# Altium PCB PCB_DevKit_ESP32.PcbDoc
Units mil, origin at the board's own origin, x right, y up, seen from the top; angles counter-clockwise.
Board outline 2364 x 1248 mil, 2 copper layers (Top Layer, Bottom Layer), stack 43.13 mil thick; 35 components, 50 nets, 194 pads, 59 vias.
Unrouted connection lines stored in the file: 2.
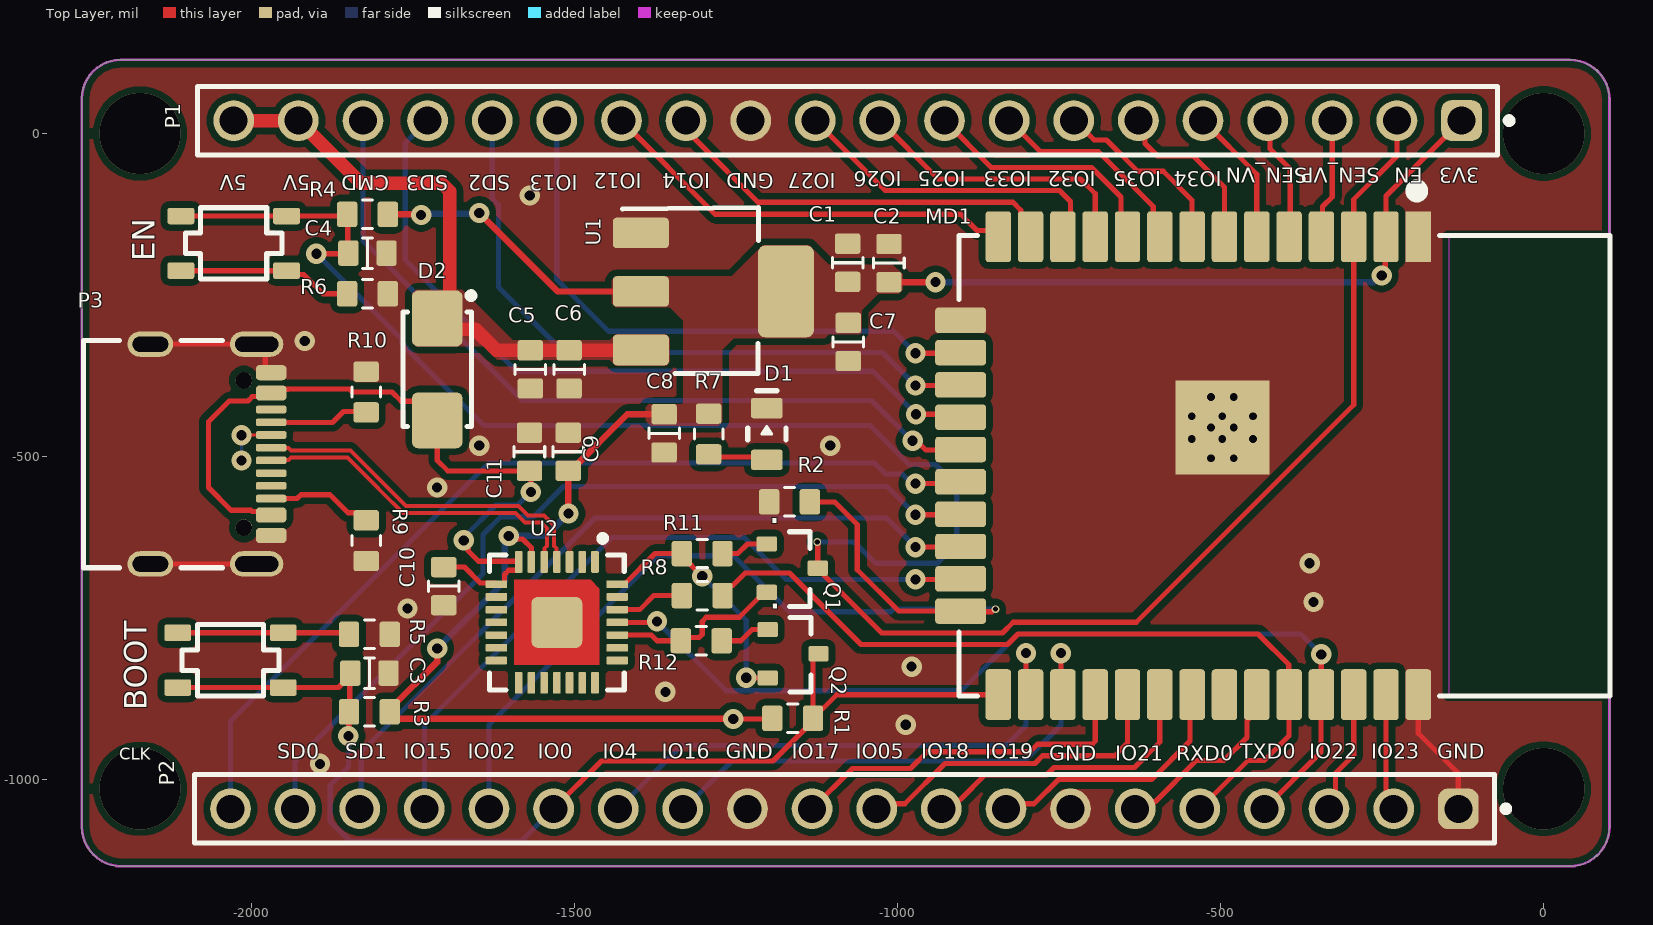
[diagram p0: Top Layer view]
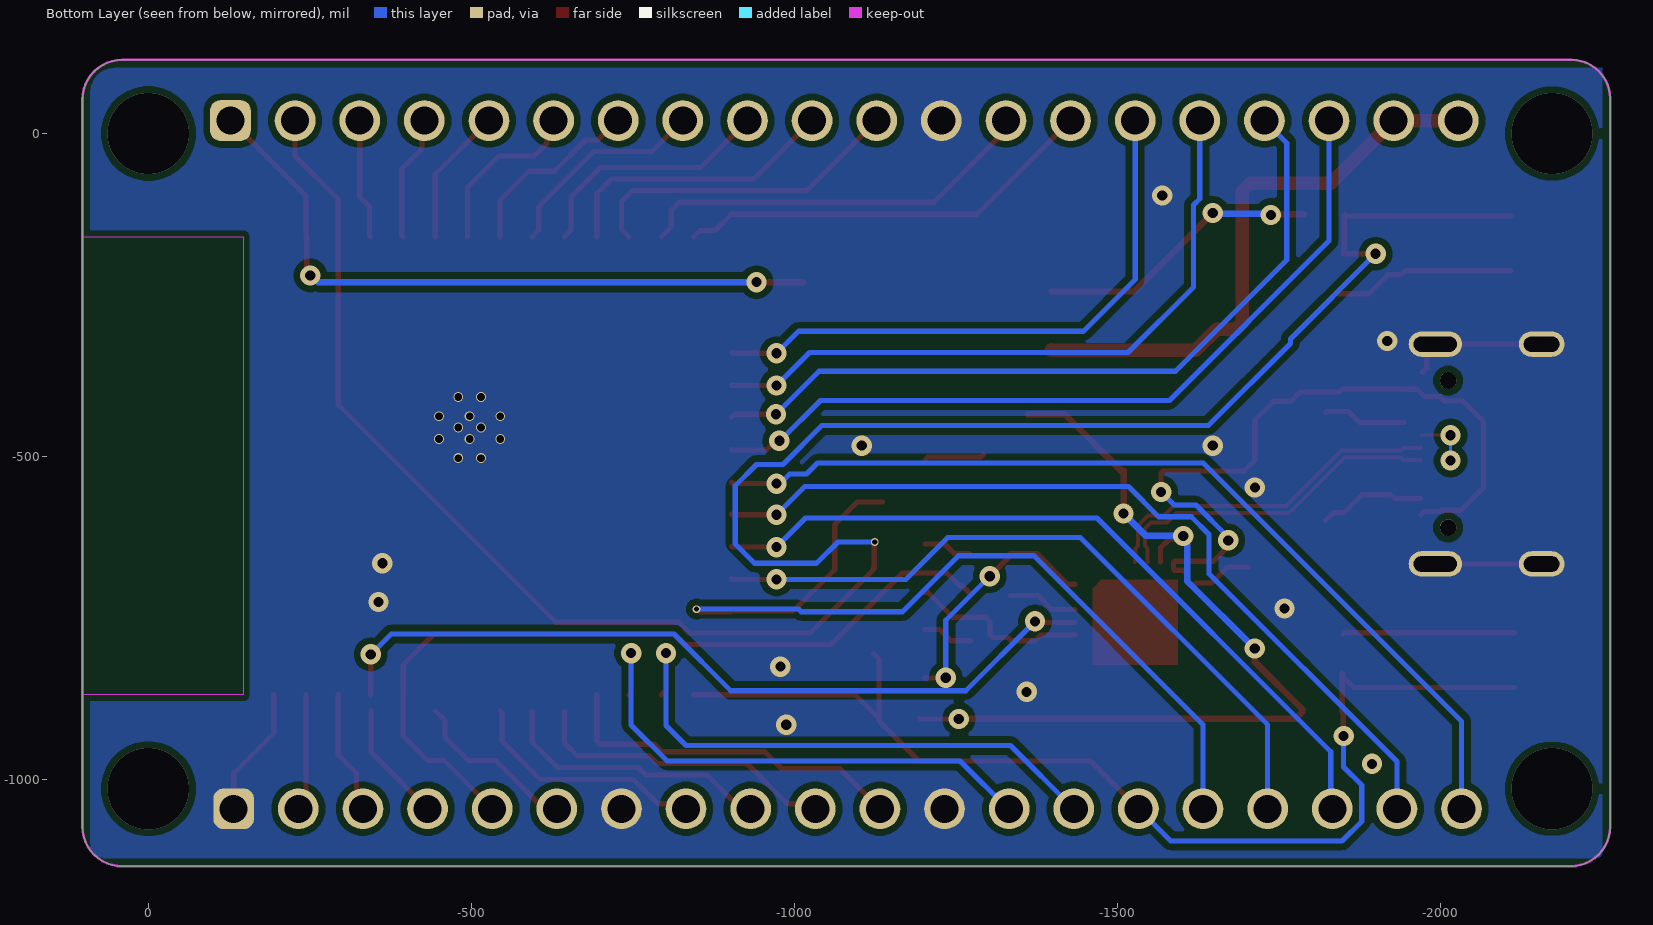
[diagram p1: Bottom Layer view, seen from below]
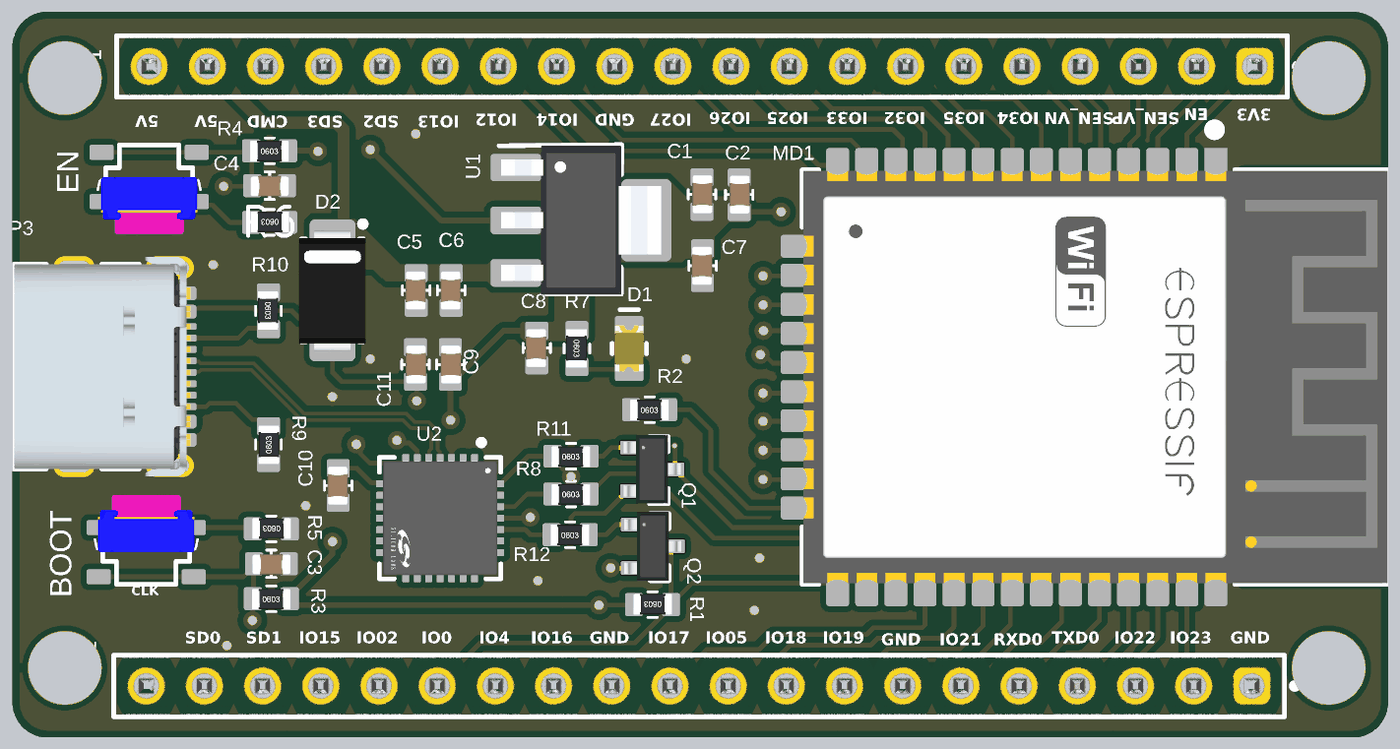
[diagram p2: 3D render of the assembled board from above, using the file's embedded part models]

## Layer stack, top to bottom
Top Solder: solder mask 0.4, Solder Resist, Dk 3.5
Top Layer: signal copper 0.6
Dielectric 1: dielectric 41.93, FR-4, Dk 4.8
Bottom Layer: signal copper 0.6
Bottom Solder: solder mask 0.4, Solder Resist, Dk 3.5

## Board outline
-2262,-1072.54 -2262,54 cw(c-2202,54) -2202,114 40.54,114 cw(c40.54,52.54) 102,52.54 102,-1072.54 cw(c40.54,-1072.54) 40.54,-1134 -2200.54,-1134 cw(c-2200.54,-1072.54)

## Design rules (kind name [scope] priority, off if disabled: settings)
Clearance [All] p1: gap=10 ignorepadtopadclearanceinfootprint=FALSE
DiffPairsRouting [InDifferentialPairClass('All Differential Pairs')] p1: maxlimit=4.99 minlimit=4.99 mostfreqgap=4.99 toplayer_minwidth=6 toplayer_maxwidth=19.13 toplayer_prefwidth=19.13 bottomlayer_minwidth=6 bottomlayer_maxwidth=19.13 bottomlayer_prefwidth=19.13 impedanceprofiledriven=TRUE impedanceprofileid={9CC0AA3F-7C3E-491D-B543-20747BA928EE} impedanceprofilevalue=90.000000 maxuncoupledlength=500
PolygonConnect [All] p1: connectstyle=Direct reliefconductorwidth=10 reliefentries=4 polygonreliefangle="90 Angle" airgapwidth=10
RoutingVias [InNetClass('All Nets')] p1: holewidth=8 width=12 viastyle="Through Hole" minholewidth=8 minwidth=12 maxholewidth=8 maxwidth=12 viatemplateguid#1={E89F5CC9-6383-4E06-893D-726549EC8DC4} viatemplatename#1=v38h30
SolderMaskExpansion [ViaDiameter] p1: expansion=0 istentingtop=TRUE useseparateexpansions=TRUE expansionbottom=0 istentingbottom=TRUE
SupplyNets "Schematic Supply Nets_3" [InNet('EXT_5V')] p1: voltage=0.000
SupplyNets "Schematic Supply Nets_2" [InNet('+3V3')] p2: voltage=0.000
SupplyNets "Schematic Supply Nets_1" [InNet('GND')] p3: voltage=0.000
Width [InNetClass('50ohm')] p1: maxlimit=73.29 minlimit=73.29 preferedwidth=73.29 impedanceprofiledriven=TRUE impedanceprofileid={D5905C2B-C446-428B-AADE-5B11549CC50C} impedanceprofilevalue=50.000000 minimp=50.000000 maximp=50.000000 favimp=50.000000
29 further rules are at their usual default settings.

## Classes and differential pairs
component class Designator: BOOT C1 C2 C3 C4 EN MD1 P2 R1 R2 R3 R4 R5 R6
differential pair D: +D_P -D_N

## Components (designator, comment, footprint, x,y, rotation, side; value= is the part's Value field where it differs from the comment)
BOOT "SKRPABE010" BTN_SKRPABE010 -2032,-815 r0 top (schematic designator BN1)
C1 "22uF" CAP_0603 -1077,-200 r270 top
C2 "0.1uF" CAP_0603 -1013,-200.47 r270 top
C3 "1uF" CAP_0603 -1817,-835 r180 top
C4 "1uF" CAP_0603 -1820,-185 r180 top
C5 "10uF" CAP_0603 -1568,-365 r90 top
C6 "100nF" CAP_0603 -1508,-365 r90 top
C7 "10uF" CAP_0603 -1076,-322.53 r90 top
C8 "100nF" CAP_0603 -1361,-464 r90 top
C9 "1uF" CAP_0603 -1509.31,-492.47 r270 top
C10 "10nF" CAP_0603 -1702,-700.47 r90 top
C11 "100nF" CAP_0603 -1569.31,-492.47 r270 top
D1 "LED RED" LED_RED_V0805 -1202,-465 r90 top
D2 "SS34" DIO_SMA -1712,-365 r270 top
EN "SKRPABE010" BTN_SKRPABE010 -2027,-170 r180 top (schematic designator BN2)
MD1 "ESP32-WROOM-32D" MD_ESP32_WROOM_D -497,-455 r270 top
P1 "61302011121" 61302011121 -1077,20 r180 top
P2 "61302011121" 61302011121 -1082,-1045 r180 top
P3 "USB_2.0_TYPE-C" CON_USB_2.0_TYPE-C -2111,-496 r270 top
Q1 "BC846x" "BJT_ BC846x" -1162.63,-672.6 r0 top
Q2 "BC846x" "BJT_ BC846x" -1161.37,-805 r0 top
R1 "5K" RES_0603 -1162,-905 r180 top
R2 "5K" RES_0603 -1167,-570 r0 top
R3 "10k" RES_0603 -1817,-895 r0 top
R4 "10k" RES_0603 -1820,-125 r0 top
R5 "330" RES_0603 -1817,-775 r180 top
R6 "330" RES_0603 -1820,-248 r180 top
R7 "220" RES_0603 -1292,-465 r270 top
R8 "470" RES_0603 -1302,-715 r0 top
R9 "5.1K" RES_0603 -1822,-630 r90 top
R10 "5.1K" RES_0603 -1822,-400 r270 top
R11 "12K" RES_0603 -1302,-650 r0 top
R12 "12K" RES_0603 -1303.5,-785 r0 top
U1 "+3V3" PWR_LD1117_SOT223 -1284.79,-244.45 r0 top
U2 "CP2102" INF_CP2102 -1527,-756.5 r270 top

## Footprints (in the part's own frame and the unit in brackets; to place one, negate y for a bottom-side part, rotate by r counter-clockwise, add the part's x,y. Pads: shape width x height; smd on the part's side, far side on the other; paste and mask are expansions set on the pad)
61302011121 [mm] "Pin Header, pitch 2.54 mm, THT, Vertical, single row, 20p"
  rrect50% 1.6x1.6 hole 1.1: 1(-24.13,0)
  round 1.6 hole 1.1: 2(-21.59,0) 3(-19.05,0) 4(-16.51,0) 5(-13.97,0) 6(-11.43,0) 7(-8.89,0) 8(-6.35,0) 9(-3.81,0) 10(-1.27,0) 11(1.27,0) 12(3.81,0) 13(6.35,0) 14(8.89,0) 15(11.43,0) 16(13.97,0) 17(16.51,0) 18(19.05,0) 19(21.59,0) 20(24.13,0)
  silkscreen extent -26.12,-1.35 25.55,1.35, body extent -25.4,-1.27 25.4,1.27, height 8.57
"BJT_ BC846x" [mm]
  rrect25% 0.8x0.6 smd mask+0.05: 1(-1,0.95) 2(-1,-0.95) 3(1,0)
  silkscreen extent -0.11,-1.5 0.7,1.43, body extent -1.24,-1.5 1.24,1.5, height 1.09
BTN_SKRPABE010 [mm]
  rrect25% 1.05x0.65 smd: 12(-2.075,1.075) 12(2.075,1.075) 34(-2.075,-1.075) 34(2.075,-1.075)
  silkscreen extent -1.9,-1.4 1.9,1.4, body extent -2.3,-1.6 2.3,1.6, height 2.51
CAP_0603 [mm]
  rrect25% 0.8x1 smd: 1(-0.75,0) 2(0.75,0)
  silkscreen extent -0.2,-0.6 0.2,0.6, body extent -0.85,-0.43 0.85,0.47, height 0.9
CON_USB_2.0_TYPE-C [mm]
  rrect50% 0.6x1.2 smd: A1/B12(-3.2,3.605) A4/B9(-2.4,3.605) A9/B4(2.4,3.605) A12/B1(3.2,3.605)
  rrect50% 0.3x1.2 smd: A5(-1.25,3.605) A6(-0.25,3.605) A7(0.25,3.605) A8(1.25,3.605) B5(1.75,3.605) B6(0.75,3.605) B7(-0.75,3.605) B8(-1.75,3.605)
  round 0.65 hole 0.65 unplated: MH1(-2.89,2.535) MH2(2.89,2.535)
  oval 1x2.1 hole 0.6 slot 1.7 at 90 deg: Shell(-4.32,3.035) Shell(4.32,3.035)
  oval 1x1.8 hole 0.6 slot 1.4 at 90 deg: Shell(-4.32,-1.145) Shell(4.32,-1.145)
  silkscreen extent -4.47,-3.76 4.47,1.7, body extent -4.79,-3.76 4.79,3.95, height 3.33
DIO_SMA [mm] "Molded Diode, 2-Leads, Body 4.25x2.50mm, IPC Medium Density"
  rrect25% 2.2x2 smd: A(2,0) C(-2,0)
  silkscreen extent -3.02,-1.35 2.25,1.45, body extent -2.61,-1.46 2.67,1.46, height 2.41
INF_CP2102 [mm]
  rrect25% 0.85x0.3 smd: 1(-2.375,1.5) 2(-2.375,1) 3(-2.375,0.5) 4(-2.375,0) 5(-2.375,-0.5) 6(-2.375,-1) 7(-2.375,-1.5) 15(2.375,-1.5) 16(2.375,-1) 17(2.375,-0.5) 18(2.375,0) 19(2.375,0.5) 20(2.375,1) 21(2.375,1.5)
  rrect25% 0.3x0.85 smd: 8(-1.5,-2.375) 9(-1,-2.375) 10(-0.5,-2.375) 11(0,-2.375) 12(0.5,-2.375) 13(1,-2.375) 14(1.5,-2.375) 22(1.5,2.375) 23(1,2.375) 24(0.5,2.375) 25(0,2.375) 26(-0.5,2.375) 27(-1,2.375) 28(-1.5,2.375)
  rrect25% 2x2 smd: 29(0,0)
  Top Layer region: -1.325,1.675 1.675,1.675 1.675,-1.675 -1.675,-1.675 -1.675,1.325 -1.325,1.675
  silkscreen extent -3.42,-2.65 2.65,2.65, body extent -2.98,-2.98 2.98,2.98, height 0.25
LED_RED_V0805 [mm]
  rrect25% 0.8x1.25 smd paste+0 mask+0: A(-1.016,0) C(1.016,0)
  silkscreen extent -0.22,-0.75 1.7,0.75, body extent -1.3,-0.85 1.3,0.85, height 0.25
MD_ESP32_WROOM_D [mm]
  rect 2x1 smd paste+0 mask+0: 1(-7.5,7.7)
  rrect25% 2x1 smd paste+0 mask+0: 2(-7.5,6.43) 3(-7.5,5.16) 4(-7.5,3.89) 5(-7.5,2.62) 6(-7.5,1.35) 7(-7.5,0.08) 8(-7.5,-1.19) 9(-7.5,-2.46) 10(-7.5,-3.73) 11(-7.5,-5) 12(-7.5,-6.27) 13(-7.5,-7.54) 14(-7.5,-8.81) 25(10.5,-8.81) 26(10.5,-7.54) 27(10.5,-6.27) 28(10.5,-5) 29(10.5,-3.73) 30(10.5,-2.46) 31(10.5,-1.19) 32(10.5,0.08) 33(10.5,1.35) 34(10.5,2.62) 35(10.5,3.89) 36(10.5,5.16) 37(10.5,6.43) 38(10.5,7.7)
  rrect25% 1x2 smd paste+0 mask+0: 15(-4.215,-10.29) 16(-2.945,-10.29) 17(-1.675,-10.29) 18(-0.405,-10.29) 19(0.865,-10.29) 20(2.135,-10.29) 21(3.405,-10.29) 22(4.675,-10.29) 23(5.945,-10.29) 24(7.215,-10.29)
  rect 3.7x3.7 smd paste+0 mask+0: 39(0,0)
  Keep-Out Layer region: -7.5,8.89 10.5,8.89 10.5,15.19 -7.5,15.19
  Keep-Out Layer region: -7.5,8.89 10.5,8.89 10.5,15.19 -7.5,15.19
  silkscreen extent -9.5,-10.36 10.55,15.24, body extent -7.5,-10.31 10.5,15.19, height 3.2
PWR_LD1117_SOT223 [mm]
  rrect25% 2.2x1.2 smd: 1(-2.85,2.3) 2(-2.85,0) 3(-2.85,-2.3)
  rrect25% 2.2x3.6 smd: 4(2.85,0)
  silkscreen extent -3.57,-3.22 1.78,3.3, body extent -3.5,-3.25 3.5,3.25, height 1.8
RES_0603 [mm]
  rrect25% 0.8x1 smd: 1(-0.8,0) 2(0.8,0)
  silkscreen extent -0.2,-0.56 0.2,0.56, body extent -0.86,-0.47 0.84,0.43, height 0.56

## Part data
BOOT EN: library part BTN_SKRPABE010, "3.2mm 2.5mm button 50mA Brick SPST 16V SMD Tactile Switches", JLCPCB Part=?, LCSC Part=?, Mfr.part=SKRPABE010
C1 C2 C3 C4 C5 C6 C7 C8 C9 C10 C11: library part CAP_0603, "0603 Multilayer Ceramic Capacitors MLCC - SMD/SMT ROHS", JLCPCB Part=?, LCSC Part=?, Mfr. Part=?, Voltage=?
D1: library part LED_RED_V0805, "20mA 615nm~630nm RED", JLCPCB Part=?, LCSC Part=?, Mrf. Part=?
D2: library part DIO_SS34, "40V 500mV@3A 3A SMC (SBD)", JLCPCB Part=?, LCSC Part=?, Mfr. Part=?
MD1: library part MD_ESP32_WROOM_D, "core ESP32-D0WD, 32Mbits, 3.3V, 40Mhz, onboard antenna", JLCPCB Part=?, LCSCPCB Part=?, Mrf. Part=?
P1 P2: library part CMP-1502-01102-3, Color=Black, Contact Resistance=20mΩ, Current Rating=3A, Operating Supply Voltage=250V, Connector Type="Male Pin", Contact Material=Copper, Contact Mating Length=5.9944mm, Contact Plating=Gold, Gender=Male, Lead Pitch=2.54mm, Mount="Through Hole", NexarPartId=32855554, Number of Contacts=20, Number of Pins=20, Number of Positions=20, Number of Rows=1, Orientation=Vertical, Packaging=Bulk, Pitch=2.54mm, REACH SVHC=Unknown, RoHS=Compliant, Termination=Solder
P3: library part CON_USB_2.0_TYPE-C, "USB Connectors USB Jack 2.0, Type-C, Horizontal SMT", JLCPCB Part=?, LCSC Part=?, Mrf. Part=?
Q1 Q2: library part "BJT_ BC846x", "Single Bipolar Transistor, NPN, 65 V, 100 mA, 250 mW, SOT23 (TO-236AB), 3 Pins, Surface Mount", JLCPCB Part=?, LCSC Part=?, Mrf. Part=?
R1 R2 R3 R4 R5 R6 R7 R8 R9 R10 R11 R12: library part RES_0603, "0603 Thick Film Resistor - Surface Mount ROHS", JLCPCB Part=?, LCSC Part=?, Mfr. Part=?
U1: library part PWR_LD1117, "Linear Voltage Regulators (LDO)", JLCPCB Part=?, LCSC Part=?, Mrf. Part=?
U2: library part INF_CP2102, "USB to UART bridge USB 2.0 3.3V, CP2102-GMR, VFQFN-28", JLCPCB Part=?, Mrf. Part=?

## Via types
v1: diameter 31.5, hole 15.75, Top Layer to Bottom Layer, tented both sides, 40 vias
v2: diameter 15, hole 11.81, Top Layer to Bottom Layer, tented both sides, 12 vias
v3: diameter 125.98, hole 125.98, Top Layer to Bottom Layer, tented both sides, 4 vias
v4: diameter 12, hole 8, Top Layer to Bottom Layer, tented both sides, 3 vias

## Nets (pads, with @x,y where several pads share a name; then routed paths per layer and width w, separated by ;. In a path a pad name is that pad's centre, name@x,y a point inside that pad or via, vN(x,y) a via of type N, cw(c..) or ccw(c..) an arc to the next point about the centre after c; other vN are vias at no path point)
+3V3: C1.2 C2.2 C7.2 C8.2 C9.2 MD1.2 P1.1 R1.2 R3.2 R4.2 R7.1 U1.2 U1.4 U2.6 | length 2865
  Top Layer w8: v1(-1601.33,-622.76) -1596.83,-627.26 -1580.22,-627.26 -1566.37,-641.11 U2.6 ; v1(-1254,-906) -1194.5,-906 R1.2 ; v1(-250.58,-219.69) -250.58,-216.98 -245,-211.4 -245,-160.87 MD1.2 -243.85,-96.85 P1.1
  Top Layer w10: R4.2 -1738.54,-125 -1737.54,-126 v1(-1737,-126) ; v1(-1712,-797) -1712.38,-797.38 -1712.38,-817.94 -1785.5,-891.06 -1785.5,-895.13 -1774.76,-905.87 -1254.13,-905.87 v1(-1254,-906) ; v1(-1647,-123) -1525.55,-244.45 U1.2 ; C9.2 -1509,-522.31 v1(-1509,-588) ; C9.2@-1505.69,-522.15 -1418.01,-434.47 C8.2 ; C2.2 v1(-941,-230)
  Bottom Layer w10: v1(-1737,-126) -1735.5,-124.5 -1648.5,-124.5 v1(-1647,-123) ; v1(-1712,-797) -1607.78,-692.78 -1607.78,-684.49 -1607.84,-684.43 -1607.84,-635.1 -1601.33,-628.58 v1(-1601.33,-622.76) -1543.76,-622.76 v1(-1509,-588) ; v1(-941,-230) -263.06,-230 -252.74,-219.69 v1(-250.58,-219.69)
CLK: MD1.20 P2.20 | length 1445.1
  Top Layer w8: v1(-972,-541.75) -904.81,-541.75 MD1.20
  Bottom Layer w8: P2.20 -2032,-909.56 -1632.44,-510 -1035.19,-510 -1018.21,-526.98 -992.48,-526.98 -977.71,-541.75 v1(-972,-541.75)
CMD: MD1.19 P1.18 | length 1245.5
  Top Layer w8: v1(-976.47,-475.47) -970.11,-475.47 -955.57,-490 -903.06,-490 MD1.19
  Bottom Layer w8: P1.18 -1827,-166 -1580,-413 -1040,-413 -977.53,-475.47 v1(-976.47,-475.47)
D_N: P3.A7 P3.B7 U2.5 | length 612.5
  Top Layer w5: v1(-2015,-467) -2014.74,-466.74 P3.B7@-1969.33,-466.74
  Top Layer w6: P3.A7 -1968.29,-505.06 -1941.79,-505.06 -1938.23,-501.49 -1851.05,-501.49 -1806.24,-546.3 -1798.77,-553.77 -1765.06,-587.48 -1590.71,-587.48 -1576.38,-601.82 -1551.38,-601.82 -1542.34,-610.86 -1542.34,-638.17 -1545.91,-641.74 -1545.91,-662.21 U2.5
  Bottom Layer w5: v1(-2015,-506) v1(-2015,-467)
D_P: P3.A6 P3.B6 U2.4 | length 546
  Top Layer w6: P3.A6 -1968.29,-486.94 -1941.79,-486.94 -1938.23,-490.51 -1846.49,-490.51 -1760.51,-576.49 -1586.16,-576.49 -1571.82,-590.83 -1546.83,-590.83 -1531.35,-606.31 -1531.35,-638.17 -1527.78,-641.74 -1527.78,-662.21 U2.4
DTR: Q2.2 R11.1 U2.28 | length 386.6
  Top Layer w8: U2.28 -1422.67,-697.44 -1375.23,-650 R11.1 -1333.5,-653.94 -1302.43,-685 v1(-1302,-685) ; v1(-1233.91,-842.18) -1233.69,-842.4 Q2.2
  Bottom Layer w8: v1(-1302,-685) -1233.91,-753.09 v1(-1233.91,-842.18)
EN: C4.2 EN.34 MD1.3 P1.2 Q1.3 R4.1 | length 3373.6
  Top Layer w8: EN.34@-2108.69,-127.68 -1945.31,-127.68 -1854.17,-127.68 R4.1 -1850.51,-125.98 -1850.51,-127.68 -1850.51,-184.02 C4.2 -1850.53,-186 v1(-1899,-186) ; v4(-1124,-632) -1123.26,-632.74 Q1.3 -1122,-671.34 -1122,-675 -1024.26,-772.74 -837.27,-772.74 -820.78,-756.25 -630.25,-756.25 -293.85,-419.85 MD1.3 -293.85,-101.85 -227,-35 P1.2
  Bottom Layer w8: v1(-1899,-186) -1767.25,-317.75 -1767.25,-324.75 -1640,-452 -1042,-452 -982,-512 -941,-512 -908,-545 -908,-635 -938,-665 -1034,-665 -1067,-632 v4(-1124,-632)
EXT_5V: C5.2 C6.2 D2.C P1.19 P1.20 U1.3 | length 896.7
  Top Layer w21: P1.20 P1.19 -1830,-77 -1705.14,-77 -1692.84,-89.3 -1692.84,-292.86 -1683.13,-302.57 -1653.43,-302.57 -1620.53,-335.47 C5.2 C6.2 -1507.76,-335.24 -1397.24,-335.24 U1.3
GND: C1.1 C2.1 C3.1 C4.1 C5.1 C6.1 C7.1 C8.1 C9.1 C10.1 C11.1 D1.C MD1.1 MD1.15 MD1.38 MD1.39 P1.12 P2.1 P2.7 P2.12 P3.A1/B12 P3.A12/B1 P3.Shell R2.1 R5.1 R6.1 R9.1 R10.1 U1.1 U2.3 | length 612.5
  Top Layer w8: P3.Shell@-2156.08,-666.08 -1991.51,-666.08 -1983.56,-666.08 P3.Shell@-1969.07,-651.59 ; P3.Shell@-2156.08,-325.92 -1991.51,-325.92 -1978.32,-339.11 -1978.32,-362.35 P3.A1/B12@-1970.66,-370.02 ; MD1.38 -193.85,-928.15 -132,-990 P2.1
  other v1: -1893.47,-975.54 -987,-915 -1359,-864 -978,-825 -1758,-735 -356,-725 -362,-665 -1712.26,-547.74 -1647,-483 -1104,-483 -1917,-321 -1569,-96
  other v2: -514.72,-502.24 -479.28,-502.24 -544.24,-472.72 -497,-472.72 -449.76,-472.72 -514.72,-455 -479.28,-455 -544.24,-437.28 -497,-437.28 -449.76,-437.28 -514.72,-407.76 -479.28,-407.76
IO0: BOOT.34 C3.2 MD1.25 P2.15 Q2.3 R1.1 R3.1 | length 1767.4
  Top Layer w8: BOOT.34@-2113.69,-857.32 -1950.31,-857.32 -1864.91,-857.32 -1846.53,-838.94 C3.2 -1847.51,-835.98 -1847.51,-894.02 -1849.03,-895.53 -1849.03,-931.89 v1(-1849.56,-932.42) ; P2.15 -1458,-971 -1192.57,-971 -1130.5,-908.94 R1.1 ; Q2.3 -1122.69,-805 -1130.5,-812.81 R1.1 ; MD1.25 -1093.89,-868.39 R1.1
  Bottom Layer w8: v1(-1849.56,-932.42) -1849.56,-980.29 -1877.5,-1008.22 -1877.5,-1064.5 -1847,-1095 -1582,-1095 P2.15
IO2: MD1.24 P2.16 R2.2 | length 1459.9
  Top Layer w8: R2.2 -1097,-570 -1062,-605 -1062,-675 -997.94,-739.06 MD1.24 -901.17,-740 -853.4,-740 -849.39,-735.99 v4(-848.31,-735.99)
  Bottom Layer w8: P2.16 -1632,-915 -1370.31,-653.31 -1253.69,-653.31 -1167,-740 -1010.2,-740 -1006.19,-735.99 v4(-848.31,-735.99)
IO4: MD1.26 P2.14 | length 863.8
  Top Layer w8: v1(-801,-804) -801,-861.24 MD1.26
  Bottom Layer w8: P2.14 -1334,-947 -831.9,-947 -801,-916.1 v1(-801,-804)
IO5: MD1.29 P2.10 | length 480.1
  Top Layer w8: P2.10 -1024.16,-1037.16 -988.5,-1037.16 -926.09,-974.75 -787.22,-974.75 -775.47,-963 -663.7,-963 -643.85,-943.15 MD1.29@-643.85,-893.39
IO12: MD1.14 P1.14 | length 657.6
  Top Layer w8: P1.14 -1282,-125 -902,-125 -877,-150 -853.57,-150 MD1.14
IO13: MD1.16 P1.15 | length 918.5
  Top Layer w8: v1(-972,-340) -903.06,-340 MD1.16
  Bottom Layer w8: P1.15 -1527,-226 -1447,-306 -1006,-306 v1(-972,-340)
IO14: MD1.13 P1.13 | length 631.6
  Top Layer w8: P1.13 -1327,5.12 -1311.74,-10.14 -1311.74,-10.26 -1215.65,-106.35 -821.25,-106.35 -808.97,-118.64 -808.97,-144.61 MD1.13
IO15: MD1.23 P2.17 | length 1107.3
  Top Layer w8: v1(-972,-690) -903.06,-690 MD1.23
  Bottom Layer w8: P2.17 -1732,-915 -1442,-625 -1237,-625 -1172,-690 v1(-972,-690)
IO16: MD1.27 P2.13 | length 815.7
  Top Layer w8: v1(-747,-804) -747,-865.24 MD1.27
  Bottom Layer w8: P2.13 -1330,-1045 -1256,-971 -802.75,-971 -747,-915.25 v1(-747,-804)
IO17: MD1.28 P2.11 | length 553.4
  Top Layer w8: P2.11 -1069.5,-982.5 -979.5,-982.5 -953.75,-956.75 -794.68,-956.75 -782.93,-945 -698.54,-945 -693.85,-940.31 MD1.28
IO18: MD1.30 P2.9 | length 429.3
  Top Layer w8: P2.9 -917.12,-1045 -901.86,-1029.74 -901.74,-1029.74 -864.75,-992.75 -769.55,-992.75 -757.8,-981 -633,-981 -593.85,-941.85 MD1.30@-593.85,-893.39
IO19: MD1.31 P2.8 | length 376.4
  Top Layer w8: P2.8 -824.16,-1037.16 -788.5,-1037.16 -750.85,-999.5 -606.5,-999.5 -547.07,-940.07 -547.07,-896.61 MD1.31@-543.85,-893.39
IO21: MD1.33 P2.6 | length 266.2
  Top Layer w8: P2.6 -621.48,-1034.48 -601.48,-1034.48 -537,-970 -494.49,-970 -458.97,-934.47 -458.97,-908.5 MD1.33@-443.85,-893.39
IO22: MD1.36 P2.3 | length 192.4
  Top Layer w8: P2.3 -322,-1035 -322,-990 -293.85,-961.85 MD1.36
IO23: MD1.37 P2.2 | length 181.5
  Top Layer w8: MD1.37 -243.85,-1018.27 -232,-1030.12 P2.2
IO25: MD1.10 P1.9 | length 387.8
  Top Layer w8: P1.9 -854.65,-52.35 -699.65,-52.35 -653.96,-98.04 -653.96,-149.62 MD1.10
IO26: MD1.11 P1.10 | length 446.6
  Top Layer w8: P1.10 -936.65,-70.35 -716.65,-70.35 -693.85,-93.15 MD1.11
IO27: MD1.12 P1.11 | length 506
  Top Layer w8: P1.11 -1018.65,-88.35 -749.1,-88.35 -732.23,-105.23 -732.23,-148.1 MD1.12
IO32: MD1.8 P1.7 | length 290.7
  Top Layer w8: P1.7 -725.49,20 -695.49,-10 -676.54,-10 -628.12,-58.43 -588.57,-58.43 -543.85,-103.15 MD1.8
IO33: MD1.9 P1.8 | length 329
  Top Layer w8: P1.8 -779,-28 -689,-28 -603.96,-113.04 -603.96,-149.62 MD1.9
IO34: MD1.6 P1.5 | length 214.2
  Top Layer w8: P1.5 -443.85,-63.15 MD1.6
IO35: MD1.7 P1.6 | length 267.1
  Top Layer w8: P1.6 -616.74,9.74 -616.74,-15.26 -597,-35 -542,-35 -493.85,-83.15 MD1.7
NetBN1_12: BOOT.12 R5.2 | length 266.2
  Top Layer w8: BOOT.12@-2113.69,-772.68 -1950.31,-772.68 -1850.82,-772.68 R5.2
NetBN2_12: EN.12 R6.2 | length 284.2
  Top Layer w8: EN.12@-2108.69,-212.32 -1945.31,-212.32 -1939.34,-218.29 -1918.71,-218.29 -1889,-248 R6.2@-1839.27,-248
NetD1_A: D1.A R7.2 | length 93.5
  Top Layer w8: R7.2 -1287.75,-500.75 -1206.25,-500.75 D1.A
NetP3_A5: P3.A5 R10.2 | length 129.7
  Top Layer w8: -1944,-447.01 -1874.01,-447.01 -1857,-430 -1823.5,-430 R10.2
NetP3_B5: P3.B5 R9.2 | length 166
  Top Layer w8: P3.B5 -1929.08,-564.9 -1923.08,-558.9 -1878.1,-558.9 -1850.24,-586.76 -1833.75,-586.76 R9.2
NetQ1_1: Q1.1 R11.2 | length 74.8
  Top Layer w8: R11.2 -1247,-650 -1232,-635 -1202.2,-635 Q1.1
NetQ2_1: Q2.1 R12.2 | length 78.5
  Top Layer w8: R12.2 -1242,-785 -1224.6,-767.6 Q2.1
NetR8_1: R8.1 U2.26 | length 109
  Top Layer w8: U2.26 -1398.81,-736.81 -1377,-715 R8.1
NetU2_10,13,14,15,16,17,19,20,21,22: 
RTS: Q1.2 R12.1 U2.24 | length 277.9
  Top Layer w8: U2.24 -1380.82,-776.18 -1372,-785 R12.1 -1329.99,-780 -1307,-780 -1302,-775 -1302,-755 -1295.69,-748.69 -1244.62,-748.69 -1205.94,-710 Q1.2
RXD0: MD1.34 P2.5 R8.2 | length 1260.7
  Top Layer w8: R8.2 -1270.5,-711.06 -1258.76,-699.31 -1254.82,-699.31 -1235.5,-680 -1167,-680 -1056.26,-790.74 -829.81,-790.74 -813.32,-774.25 -441.75,-774.25 -394.3,-821.7 -394.3,-867.94 MD1.34 -393.85,-931.85 -432,-970 -457,-970 P2.5
SD0: MD1.21 P2.19 | length 1333.3
  Top Layer w8: v1(-972,-590) -903.06,-590 MD1.21
  Bottom Layer w8: P2.19 -1932,-972 -1641.25,-681.25 -1641.25,-620.62 -1613.65,-593.02 -1563.26,-593.02 -1516.49,-546.25 -1015.75,-546.25 v1(-972,-590)
SD1: MD1.22 P2.18 | length 1185.7
  Top Layer w8: v1(-972,-640) -903.06,-640 MD1.22
  Bottom Layer w8: P2.18 -1829.56,-1042.56 -1829.56,-956.56 -1468,-595 -1017,-595 v1(-972,-640)
SD2: MD1.17 P1.16 | length 1040.4
  Top Layer w8: v1(-972,-390) -903.06,-390 MD1.17
  Bottom Layer w8: P1.16 -1627,-100.93 -1617.25,-110.68 -1617.25,-237.75 -1516,-339 -1023,-339 v1(-972,-390)
SD3: MD1.18 P1.17 | length 1190.2
  Top Layer w8: v1(-971.28,-434.29) -906.88,-434.29 MD1.18
  Bottom Layer w8: P1.17 -1761.5,-14.5 -1761.5,-195.76 -1589.26,-368 -1037.58,-368 v1(-971.28,-434.29)
SEN_VN: MD1.5 P1.4 | length 195
  Top Layer w8: P1.4 -423.5,16.5 -423.5,-23.5 -392,-55 -392,-157.87 MD1.5
SEN_VP: MD1.4 P1.3 | length 186.7
  Top Layer w8: MD1.4 -341.95,-157.82 -341.95,-113.04 -327,-98.09 P1.3
TXD0: MD1.35 P2.4 U2.25 | length 1434.9
  Top Layer w8: U2.25 -1374.58,-756.5 -1373.08,-755 v1(-1372,-755) ; v4(-432,-1045) -344.25,-957.25 MD1.35@-344.25,-892.99 ; v1(-344,-806) -344,-868.24 MD1.35
  Bottom Layer w8: v1(-1372,-755) -1264.82,-862.18 -901.25,-862.18 -813.32,-774.25 -375.75,-774.25 v1(-344,-806)
VBUS: C10.2 C11.2 D2.A P3.A4/B9 P3.A9/B4 U2.7 U2.8 | length 1254.5
  Top Layer w8: P3.A9/B4 -1974.76,-584.8 -1998.28,-584.8 -2000.1,-582.98 -2031.02,-582.98 -2066,-548 -2066,-446 -2034,-414 -2005.08,-414 -1998.28,-407.2 -1974.76,-407.2 P3.A4/B9 -1963.39,-395.83 -1943.11,-395.83 -1942.79,-395.51 -1847.92,-395.51 -1843.43,-400 -1782,-400 -1767.72,-414.28 -1741.46,-414.28 D2.A -1712,-505.93 -1695.93,-522 C11.2 ; C10.2 -1670.06,-670.94 -1645.46,-695.54 -1622.41,-695.54 U2.8 -1609.68,-697.44 -1607.77,-695.54 -1607.77,-682.23 -1601.27,-675.72 -1587.96,-675.72 -1586.06,-673.82 U2.7 -1586.97,-662.99 -1587.96,-662 -1648,-662 -1664.06,-645.94 -1664.06,-642.94 -1671,-636 v1(-1671,-629.64) ; C11.2@-1570.78,-522 -1567.15,-525.63 v1(-1567.15,-554.84)
  Bottom Layer w8: v1(-1671,-629.64) -1671,-624.91 -1621.1,-575.02 -1587.33,-575.02 v1(-1567.15,-554.84)
pads on no net: MD1.32 P3.A8 P3.B8 P3.MH1 P3.MH2 U2.1 U2.2 U2.9 U2.10 U2.11 U2.12 U2.13 U2.14 U2.15 U2.16 U2.17 U2.18 U2.19 U2.20 U2.21 U2.22 U2.23 U2.27 U2.29
copper on no net:
  other v3: -2172.01,-1014 0,-1014 -2172,0 0,0

## Polygon pours and split planes (outlines as drawn)
GND on Top Layer "GND_L01_P008" (solid, remove dead copper, pour order 8): -2259,117 99,117 99,-1125 96.68,-1127.32 94.46,-1127.32 90.78,-1131 -2265,-1131
EXT_5V on Top Layer "EXT_5V_L01_P000" (solid, pour order 0): -1751,-248 -1751,-323 -1745,-329 -1640,-329 -1619,-350 -1445,-350 -1436,-359 -1358,-359 -1352,-353 -1352,-317 -1358,-311 -1436,-311 -1445,-320 -1595,-320 -1673,-242 -1745,-242 -1673,-242 -1745,-242
+3V3 on Top Layer "+3V3_L01_P002" (solid, remove dead copper, pour order 2): -1436,-221 -1442,-227 -1442,-263 -1436,-269 -1352,-269 -1331,-290 -1331,-416 -1334,-419 -1385,-419 -1389.5,-423.5 -1389.5,-444.5 -1382,-452 -1277,-452 -1271,-446 -1271,-269 -1319,-221
+3V3 on Top Layer "+3V3_L01_P005" (solid, remove dead copper, pour order 5): -1319,-221 -1256,-221 -1208,-173 -1136,-173 -1106,-203 -1007,-203 -992,-218 -992,-242 -998,-248 -1029.81,-248 -1055,-273.19 -1055,-308 -1058,-311 -1094,-311 -1106,-311 -1112,-317 -1247,-317 -1253,-317 -1280,-344 -1286,-344 -1286,-281 -1337,-230
GND on Bottom Layer "GND_L02_P009" (solid, remove dead copper, pour order 9): -2253,114 105,114 105,-1128 102.68,-1130.32 100.46,-1130.32 96.78,-1134 -2259,-1134

## Keep-outs
Keep-Out Layer:
  the board outline again, w3.94

## Silkscreen, mask and mechanical layers (free items; w line width, h text height)
Top Overlay:
  text "SEN_VN" at -365.81,-45 h39.37 r180
  text "SEN_VP" at -253.51,-45 h39.37 r180
  text "EN" at -187.06,-45 h39.37 r180
  text "3V3" at -99.59,-45 h39.37 r180
  text "IO26" at -993.08,-51 h39.37 r180
  text "IO25" at -894.38,-51 h39.37 r180
  text "IO33" at -792.3,-51 h39.37 r180
  text "IO32" at -693.25,-51 h39.37 r180
  text "IO35" at -591.38,-51 h39.37 r180
  text "IO34" at -497.86,-51 h39.37 r180
  text "IO12" at -1395.25,-54 h39.37 r180
  text "IO14" at -1289.86,-54 h39.37 r180
  text "GND" at -1191.14,-54 h39.37 r180
  text "IO27" at -1095.25,-54 h39.37 r180
  text "5V" at -2007.12,-57 h39.37 r180
  text "5V" at -1908.88,-57 h39.37 r180
  text "CMD" at -1786.11,-57 h39.37 r180
  text "SD3" at -1695.28,-57 h39.37 r180
  text "SD2" at -1599.24,-57 h39.37 r180
  text "IO13" at -1494.3,-57 h39.37 r180
  text "CLK" at -2203.95,-975 h31.5
  text "SD0" at -1960.01,-975 h39.37
  text "SD1" at -1854.68,-975 h39.37
  text "IO15" at -1763.67,-975 h39.37
  text "IO02" at -1664.78,-975 h39.37
  text "IO0" at -1556.8,-975 h39.37
  text "IO4" at -1455.93,-975 h39.37
  text "IO16" at -1364.92,-975 h39.37
  text "GND" at -1265.87,-975 h39.37
  text "IO17" at -1163.78,-975 h39.37
  text "IO05" at -1064.67,-975 h39.37
  text "IO18" at -962.92,-975 h39.37
  text "IO19" at -863.81,-975 h39.37
  text "TXD0" at -469.63,-975 h39.37
  text "IO22" at -362.78,-975 h39.37
  text "IO23" at -266.74,-975 h39.37
  text "GND" at -164.87,-975 h39.37
  text "GND" at -764.87,-978 h39.37
  text "IO21" at -662.67,-978 h39.37
  text "RXD0" at -568.71,-978 h39.37